# Altium PCB Adapter.PcbDoc
Units mil, origin at the board's own origin, x right, y up, seen from the top; angles counter-clockwise.
Board outline 5085 x 4025 mil, 2 copper layers (Top Layer, Bottom Layer); 16 components, 65 nets, 204 pads, 53 vias.
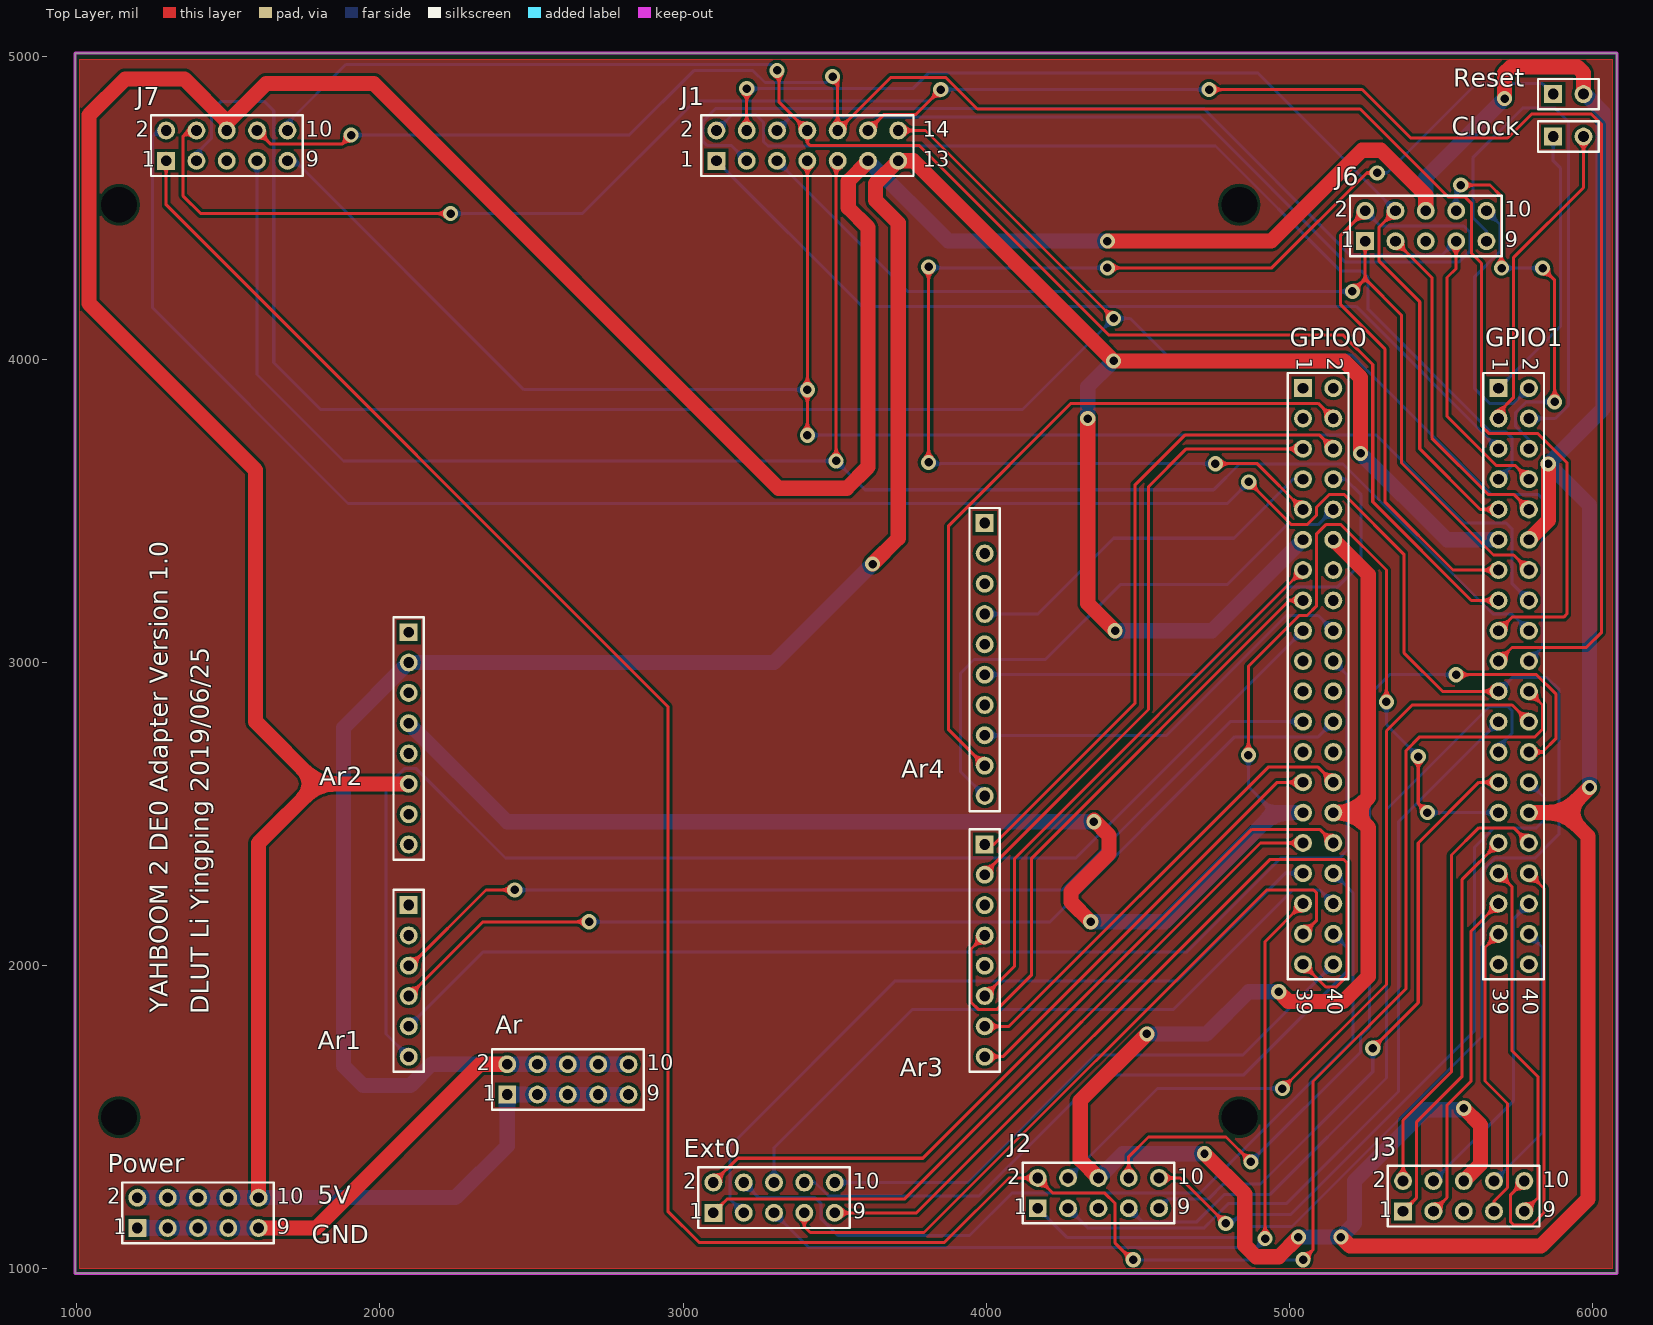
[diagram p0: Top Layer view]
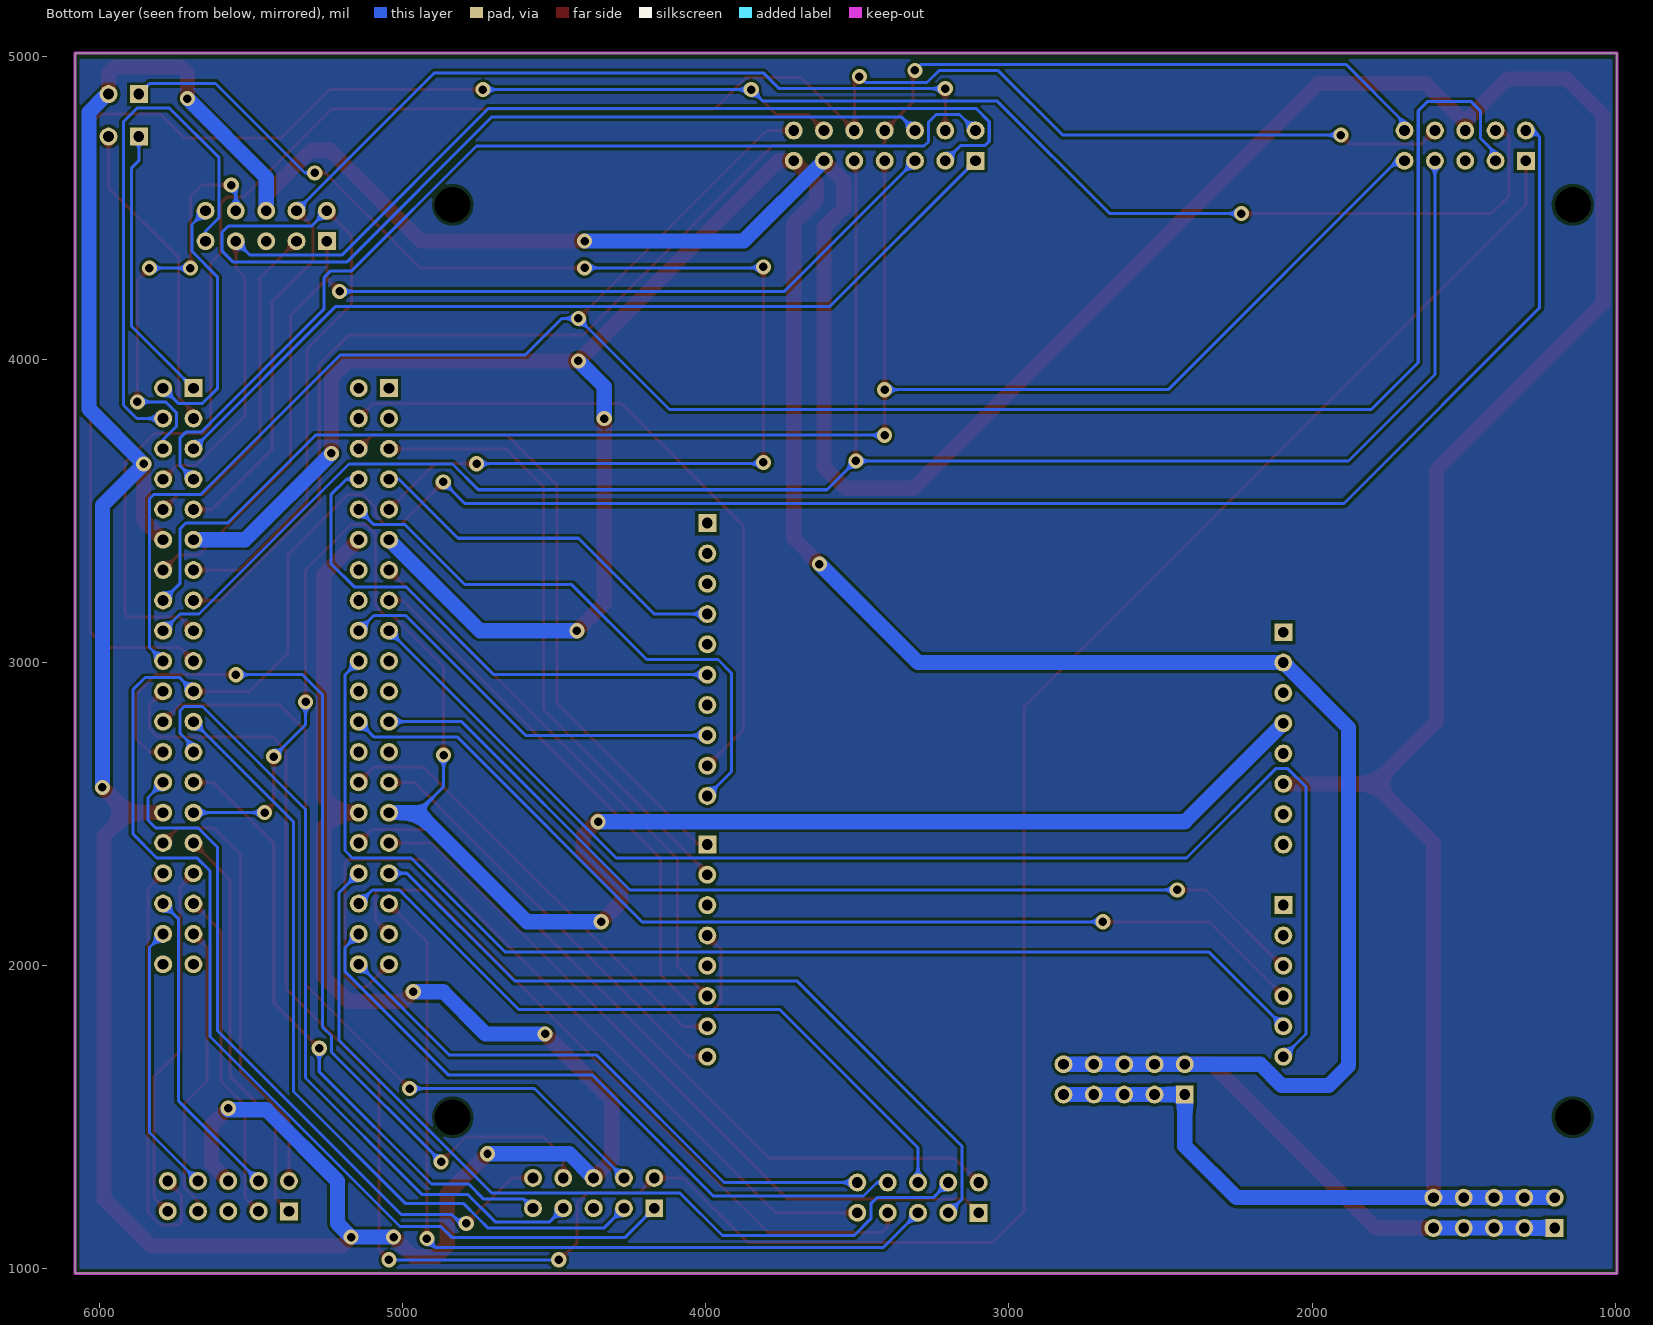
[diagram p1: Bottom Layer view, seen from below]

## Layer stack, top to bottom
Top Solder: solder mask 0.4, Solder Resist, Dk 3.5
Top Layer: signal copper 1.4
Dielectric 1: dielectric 12.6, FR-4, Dk 4.8
Bottom Layer: signal copper 1.4
Bottom Solder: solder mask 0.4, Solder Resist, Dk 3.5

## Board outline
995,985 995,5010 6080,5010 6080,985

## Design rules (kind name [scope] priority, off if disabled: settings)
Clearance [All] p1: gap=10 ignorepadtopadclearanceinfootprint=FALSE except(0: Arc-Hole Track-Hole SMDPad-Hole THPad-Hole Via-Hole Fill-Hole Poly-Hole Region-Hole Text-Hole)
HoleToHoleClearance [All] p1: gap=5 allowstackedmicrovias=TRUE
MinimumSolderMaskSliver [All] p1: minsoldermaskwidth=5
PolygonConnect [All] p1: connectstyle=Relief reliefconductorwidth=10 reliefentries=4 polygonreliefangle="90 Angle" airgapwidth=10
RoomDefinition Adapter [InComponentClass('Adapter')] p1: confinementstyle=ConfineIn formatcopy=TRUE lockcomponents=FALSE outline 1010,1000 6065,1000 6065,4990 1010,4990
RoutingVias [All] p1: holewidth=28 width=50 viastyle="Through Hole" minholewidth=28 minwidth=50 maxholewidth=28 maxwidth=50
SilkToSilkClearance [All] p1: silktosilkclearance=5
SilkToSolderMaskClearance [IsPad] p1: minsilkscreentomaskgap=5 clearancetoexposedcopper=TRUE
SolderMaskExpansion [All] p1: expansion=4
Width [All] p1: maxlimit=50 minlimit=10 preferedwidth=10 minimp=50.000000 maximp=50.000000 favimp=50.000000
26 further rules are at their usual default settings.

## Components (designator, comment, footprint, x,y, rotation, side; value= is the part's Value field where it differs from the comment)
Ar "HEADER 5X2" HDR2X5 2420,1575 r0 top
Ar1 "CON6" HDR1X6 2095,2200 r270 top
Ar2 "CON8" HDR1X8 2095,3100 r270 top
Ar3 "CON8" HDR1X8 3995,2400 r270 top
Ar4 "CON10" HDR1X10 3995,3460 r270 top
Clock "CON2" HDR1X2 5870,4735 r0 top
Ext0 "HEADER 5X2" HDR2X5 3100,1185 r0 top
GPIO0 "HEADER 20X2" HDR2X20 5045,3905 r270 top
GPIO1 "HEADER 20X2" HDR2X20 5690,3905 r270 top
J1 "HEADER 7X2" HDR2X7 3110,4655 r0 top
J2 "HEADER 5X2" HDR2X5 4170,1200 r0 top
J3 "HEADER 5X2" HDR2X5 5375,1190 r0 top
J6 "HEADER 5X2" HDR2X5 5250,4390 r0 top
J7 "HEADER 5X2" HDR2X5 1295,4655 r0 top
Power "HEADER 5X2" HDR2X5 1200,1135 r0 top
Reset "CON2" HDR1X2 5870,4875 r0 top

## Footprints (in the part's own frame and the unit in brackets; to place one, negate y for a bottom-side part, rotate by r counter-clockwise, add the part's x,y. Pads: shape width x height; smd on the part's side, far side on the other; paste and mask are expansions set on the pad)
HDR1X2 [mm] "Connector; Header; 2 Position"
  rect 1.5x1.5 hole 0.9: 1(0,0)
  round 1.5 hole 0.9: 2(2.54,0)
  silkscreen extent -1.27,-1.27 3.81,1.27
HDR1X6 [mm] "Connector; Header; 6 Position"
  rect 1.5x1.5 hole 0.9: 1(0,0)
  round 1.5 hole 0.9: 2(2.54,0) 3(5.08,0) 4(7.62,0) 5(10.16,0) 6(12.7,0)
  silkscreen extent -1.27,-1.27 13.97,1.27
HDR1X8 [mm] "Connector; Header; 8 Position"
  rect 1.5x1.5 hole 0.9: 1(0,0)
  round 1.5 hole 0.9: 2(2.54,0) 3(5.08,0) 4(7.62,0) 5(10.16,0) 6(12.7,0) 7(15.24,0) 8(17.78,0)
  silkscreen extent -1.27,-1.27 19.05,1.27
HDR1X10 [mm] "Connector; Header; 10 Position"
  rect 1.5x1.5 hole 0.9: 1(0,0)
  round 1.5 hole 0.9: 2(2.54,0) 3(5.08,0) 4(7.62,0) 5(10.16,0) 6(12.7,0) 7(15.24,0) 8(17.78,0) 9(20.32,0) 10(22.86,0)
  silkscreen extent -1.27,-1.27 24.13,1.27
HDR2X5 [mm] "Connector; Header; 5x2 Position"
  rect 1.5x1.5 hole 0.9: 1(0,0)
  round 1.5 hole 0.9: 2(0,2.54) 3(2.54,0) 4(2.54,2.54) 5(5.08,0) 6(5.08,2.54) 7(7.62,0) 8(7.62,2.54) 9(10.16,0) 10(10.16,2.54)
  silkscreen extent -1.27,-1.27 11.43,3.81
HDR2X7 [mm] "Connector; Header; 7x2 Position"
  rect 1.5x1.5 hole 0.9: 1(0,0)
  round 1.5 hole 0.9: 2(0,2.54) 3(2.54,0) 4(2.54,2.54) 5(5.08,0) 6(5.08,2.54) 7(7.62,0) 8(7.62,2.54) 9(10.16,0) 10(10.16,2.54) 11(12.7,0) 12(12.7,2.54) 13(15.24,0) 14(15.24,2.54)
  silkscreen extent -1.27,-1.27 16.51,3.81
HDR2X20 [mm] "Connector; Header; 20x2 Position"
  rect 1.5x1.5 hole 0.9: 1(0,0)
  round 1.5 hole 0.9: 2(0,2.54) 3(2.54,0) 4(2.54,2.54) 5(5.08,0) 6(5.08,2.54) 7(7.62,0) 8(7.62,2.54) 9(10.16,0) 10(10.16,2.54) 11(12.7,0) 12(12.7,2.54) 13(15.24,0) 14(15.24,2.54) 15(17.78,0) 16(17.78,2.54) 17(20.32,0) 18(20.32,2.54) 19(22.86,0) 20(22.86,2.54) 21(25.4,0) 22(25.4,2.54) 23(27.94,0) 24(27.94,2.54) 25(30.48,0) 26(30.48,2.54) 27(33.02,0) 28(33.02,2.54) 29(35.56,0) 30(35.56,2.54) 31(38.1,0) 32(38.1,2.54) 33(40.64,0) 34(40.64,2.54) 35(43.18,0) 36(43.18,2.54) 37(45.72,0) 38(45.72,2.54) 39(48.26,0) 40(48.26,2.54)
  silkscreen extent -1.27,-1.27 49.53,3.81

## Part data
Clock Reset: "Connector"

## Free pads (board coordinates)
  round 60 hole 118.11: 1(4835,1500) 2(1140,1500) 3(1140,4510) 4(4835,4510)

## Via types
v1: diameter 50, hole 28, Top Layer to Bottom Layer, 53 vias

## Nets (pads, with @x,y where several pads share a name; then routed paths per layer and width w, separated by ;. In a path a pad name is that pad's centre, name@x,y a point inside that pad or via, vN(x,y) a via of type N, cw(c..) or ccw(c..) an arc to the next point about the centre after c; other vN are vias at no path point)
3.3V: Ar2.4 GPIO0.29 GPIO1.29 | length 6137.2
  Top Layer w10: v1(4865,2695) 4865,2987.97 5032.26,3155.24 5058.21,3155.24 5090,3187.03 5090,3425 5120,3455 5170,3455 5320,3305 v1(5320,2870) ; v1(5425,2690) 5425,2535 v1(5455,2505)
  Top Layer w50: v1(4345,2145) 4280,2210 4280,2245 4405,2370 4405,2430 4355,2480 v1(4355,2475)
  Bottom Layer w10: v1(4865,2695) 4865,2590 4950,2505 ; v1(5320,2870) 5320,2795 v1(5425,2690) ; v1(5455,2505) GPIO1.29
  Bottom Layer w50: Ar2.4 2420,2475 v1(4355,2475) ; v1@4350,2145 4590,2145 4950,2505 GPIO0.29
5V: Ar2.2 Ar.2 Ar.4 Ar.6 Ar.8 Ar.10 GPIO0.11 GPIO1.11 J1.13 Power.1 Power.3 Power.5 Power.7 Power.9 | length 11304.5
  Top Layer w50: Power.9 1790,1135 2330,1675 Ar.2 ; v1(3625,3325) 3710,3410 3710,4450 3635,4525 3635,4580 J1.13 3760,4655 v1(4420,3995) 5180,3995 5235,3940 v1(5235,3690) ; v1(4335,3805) 4335,3195 v1(4425,3105)
  Bottom Layer w10: v1@4415,3990 4420,3990 v1(4420,3995)
  Bottom Layer w50: Power.1 Power.3 Power.5 Power.7 Power.9 ; Ar.10 Ar.8 Ar.6 Ar.4 Ar.2 2170.86,1675 2100.86,1605 1945,1605 1880,1670 1880,2785 Ar2.2 3300,3000 v1(3625,3325) ; v1(4335,3805) 4335,3910 v1@4415,3990 ; v1(4425,3105) 4745,3105 GPIO0.11 ; v1(5235,3690) 5520,3405 GPIO1.11
CLKB0: Clock.1 GPIO1.1 | length 925.3
  Bottom Layer w10: GPIO1.1 5895,4110 5895,4630 5870,4655 Clock.1
CLKB1: Clock.2 GPIO1.3 | length 1052.2
  Top Layer w10: GPIO1.3 5690,3824.73 5740,3874.73 5740,4336.55 5970,4566.55 5970,4720 Clock.2@5985,4735
DA22: Ext0.1 GPIO0.31 | length 2450.3
  Top Layer w10: Ext0.1 3145,1230 3730,1230 4905,2405 GPIO0.31
DA23: Ext0.2 GPIO0.32 | length 2546.2
  Top Layer w10: Ext0.2 3180,1365 3791,1365 4876,2450 5100,2450 GPIO0.32
DA24: Ext0.3 GPIO0.33 | length 2501.4
  Bottom Layer w10: Ext0.3 3155,1230 3155,1405 3700,1950 4631.2,1950 4986.2,2305 GPIO0.33
DA25: Ext0.4 GPIO0.34 | length 2955.5
  Bottom Layer w10: Ext0.4 3250,1235 3435.47,1235 3455.47,1215 3455.47,1165 3510.47,1110 3945,1110 4085,1250 4705,1250 5209.53,1754.53 5209.53,2240.47 GPIO0.34
DA26: Ext0.5 GPIO0.35 | length 2837.2
  Top Layer w10: v1(4920,1100) 4920,2080 GPIO0.35
  Bottom Layer w10: Ext0.5 3414,1071 4893,1071 4920,1098 v1(4920,1100)
DA27: Ext0.6 GPIO0.36 | length 2330.7
  Bottom Layer w10: Ext0.6 3300,1400 3755,1855 4616,1855 5011,2250 5100,2250 GPIO0.36
DA28: Ext0.7 GPIO0.37 | length 2369.1
  Top Layer w10: Ext0.7 3400,1140 3420,1120 3795,1120 4925,2250 5080,2250 5090,2240 5090,2150 GPIO0.37
DA29: Ext0.8 GPIO0.38 | length 2257.7
  Bottom Layer w10: Ext0.8 3435.47,1285 3480,1240.47 3975.47,1240.47 4375,1640 4849.53,1640 5189.53,1980 5189.53,2060.47 GPIO0.38
DA30: Ext0.9 GPIO0.39 | length 2742.3
  Top Layer w10: Ext0.9 3770,1185 4935,2350 5180,2350 5190,2340 5190,1965 5155,1930 5120,1930 GPIO0.39
DA31: Ext0.10 GPIO0.40 | length 1943.2
  Bottom Layer w10: Ext0.10 3940,1285 4360,1705 4845,1705 GPIO0.40
DB0: GPIO1.2 J6.10 | length 860.4
  Bottom Layer w10: J6.10 5695,4445 5695,4356.29 5610,4271.29 5610,3904.73 5659.73,3855 5740,3855 GPIO1.2
DB1: GPIO1.4 J6.9 | length 1780.4
  Bottom Layer w10: J6.9 5650,4423 5605,4468 5605,4665 5769.53,4829.53 5875.47,4829.53 5920.74,4784.26 5920.74,3849.17 5876.57,3805 GPIO1.4
DB2: GPIO1.5 J1.1 | length 2973.7
  Bottom Layer w10: J1.1 3590.19,4174.81 4403.24,4174.81 4403.43,4175 4436.57,4175 4436.76,4174.81 5220.19,4174.81 GPIO1.5
DB3: GPIO1.6 J6.8 | length 1352.1
  Top Layer w10: v1(5565,4575) 5662,4575 5699,4538 5699,4302 v1(5700,4301) ; v1(5835,4301) 5875,4261 v1(5875,3860)
  Bottom Layer w10: J6.8 5550,4560 v1(5565,4575) ; v1(5700,4301) v1(5835,4301) ; GPIO1.6 5790,3735.47 5745.47,3780 5745.47,3823.44 5782.03,3860 v1(5875,3860)
DB4: GPIO1.7 J1.2 | length 3341.6
  Bottom Layer w10: J1.2 3163,4808 3240,4808 3265.47,4782.53 3265.47,4718.07 3280,4703.54 4756.46,4703.54 5167.89,4292.11 5236.78,4292.11 5260,4268.89 5260,4165 5665,3760 5715,3760 5735,3740 5735,3650 GPIO1.7
DB5: GPIO1.8 J1.3 J6.7 | length 3904
  Top Layer w10: J6.7 5550,4299.93 5520,4269.93 5520,3812.03 5682.03,3650 5745,3650 GPIO1.8
  Bottom Layer w10: J1.3 3160,4705 3080,4705 3065,4720 3065,4784 3109,4828 4716.49,4828 5199.49,4345 5505,4345 J6.7
DB6: GPIO1.9 J1.4 J6.4 | length 3694.5
  Top Layer w10: J1.4 v1(3210,4893) ; J6.4 5295,4435 5295,4325 5430,4190 5430,3705 5630,3505 GPIO1.9
  Bottom Layer w10: v1(3210,4893) 3758,4893 3810,4945 4895,4945 J6.4
DB7: GPIO1.10 J6.3 | length 1117
  Top Layer w10: J6.3 5470,4270 5470,3740 5655,3555 5740,3555 GPIO1.10
DB8: GPIO1.13 J1.6 J6.2 | length 4476.2
  Top Layer w10: J6.2 5168,4408 5168,4182 5315,4035 5315,3530 5540,3305 GPIO1.13
  Bottom Layer w10: J1.6 3355,4800 4705,4800 5183,4322 5560,4322 5595,4357 5595,4420 5575,4440 5300,4440 J6.2
DB9: GPIO1.14 J1.5 J6.1 | length 3483.8
  Top Layer w10: v1(5208,4224) 5250,4266 ; J6.1 5250,4266 ; GPIO1.14 5740,3355 5673,3355 5370,3658 5370,4146 5250,4266
  Bottom Layer w10: J1.5 3741,4224 v1(5208,4224)
DB10: GPIO1.15 J1.8 J7.10 | length 5153.1
  Top Layer w10: v1(3310,4953) 3317,4946 3317,4848 J1.8 3410,4715 3420,4705 3780,4705 4405,4080 5178,4080 5275,3983 5275,3530 5600,3205 GPIO1.15
  Bottom Layer w10: J7.10@1695,4780 1887.5,4972.5 3290.5,4972.5 v1(3310,4953)
DB11: GPIO1.16 J1.7 J7.9 | length 5654.3
  Top Layer w10: v1(3410,3750) v1(3410,3900) J1.7
  Bottom Layer w10: J7.9@1695,4680 2475,3900 v1(3410,3900) ; v1(3410,3750) 5287,3750 5577,3460 5715,3460 5735,3440 5735,3260 GPIO1.16
DB12: GPIO1.17 J1.10 J7.8 | length 6413.7
  Top Layer w10: J7.8@1595,4780 J7.8 1640,4710 1875,4710 v1(1905,4740) ; v1(3493,4933) 3510,4916 J1.10 3685,4930 3866.57,4930 3970.57,4826 5233.59,4826 5524.59,4535 5580,4535 5600,4515 5600,4351 5634,4317 5634,3780 5659,3755 5820,3755 5915,3660 5915,3160 5904.53,3149.53 5734.53,3149.53 GPIO1.17
  Bottom Layer w10: v1(1905,4740) 2823,4740 3035.5,4952.5 3230.5,4952.5 3270,4913 3473,4913 v1(3493,4933)
DB13: GPIO1.18 J1.9 J7.7 | length 6337.5
  Top Layer w10: v1(3505,3665) 3505,4650 J1.9
  Bottom Layer w10: J7.7@1595,4680 J7.7 1595,3950 1880,3665 v1(3505,3665) 3600,3570 4750.14,3570 4835.14,3655 5177.03,3655 5671.56,3160.47 5734.53,3160.47 GPIO1.18
DB14: GPIO1.20 J1.14 J7.3 | length 7360.9
  Top Layer w10: J1.14 3800,4755 v1(4420,4135)
  Bottom Layer w10: J7.3@1395,4680 1445,4730 1445,4820 1475,4850 1620,4850 1650,4820 1650,3990 1805,3835 4120,3835 v1(4420,4135) 4475,4135 4595,4015 5205.19,4015 5665.19,3555 5820,3555 5835,3540 5835,3050 GPIO1.20
DB15: GPIO1.22 J2.2 J7.1 | length 9035.2
  Top Layer w10: J7.1@1295,4680 J7.1 1295,4510 2950,2855 2950,1190 3053,1087 3862,1087 4075,1300 J2.2 4220,1250 4390.94,1250 4425.47,1215.47 4425.47,1085 v1@4485.24,1025.24 ; v1(5045,1030) 5078,1063 5078,1618 5385,1925 5385,2710 5430,2755 5810,2755 5835,2780 5835,2860 GPIO1.22
  Bottom Layer w10: v1(4485.24,1030.24) 4485.35,1030.12 5044.88,1030.12 v1(5045,1030)
DB16: GPIO1.23 J2.3 | length 2660
  Bottom Layer w10: J2.3 4334.53,1135.47 4719.47,1135.47 4750,1166 4750,1166.57 4798.43,1215 4990,1215 5360,1585 5360,2475 GPIO1.23
DB17: GPIO1.24 J2.4 | length 2679.3
  Top Layer w10: v1(4977,1595) 5320,1938 5320,2775 5405,2860 5735,2860 GPIO1.24
  Bottom Layer w10: J2.4 4565,1595 v1(4977,1595)
DB18: GPIO1.25 J2.7 | length 2665.7
  Bottom Layer w10: J2.7 4514.53,1155.47 4694.47,1155.47 4784,1245 4935,1245 5320,1630 5320,2515 5660,2855 5720,2855 5735,2840 5735,2767.81 5690,2722.81 GPIO1.25
DB19: GPIO1.26 J2.8 | length 3160.7
  Top Layer w10: J2.8 4470,1370 4535,1435 4791,1435 v1(4873,1353) ; v1(5550,2960) 5815,2960 5880,2895 5880,2750 5835,2705 GPIO1.26
  Bottom Layer w10: v1(4873,1353) 5234.68,1714.68 5234.68,1768.1 5264,1797.42 5264,2894 5330,2960 v1(5550,2960)
DB20: GPIO1.27 J2.9 | length 2056.4
  Top Layer w10: v1(5275,1728) 5425,1878 5425,2405 5625,2605 GPIO1.27
  Bottom Layer w10: J2.9 4600,1230 4732,1230 4782,1280 4905,1280 5275,1650 v1(5275,1728)
DB21: GPIO1.28 J2.10 | length 2383.1
  Top Layer w10: J2.10 4640,1300 v1(4790,1150)
  Bottom Layer w10: v1(4790,1150) 4809,1150 4839,1180 5005,1180 5610,1785 5610,2390 5675,2455 5815,2455 5840,2480 5840,2555 GPIO1.28
DB22: GPIO1.31 J3.1 | length 1345.5
  Top Layer w10: J3.1 5420,1235 5420,1485 5570,1635 5570,2285 GPIO1.31
DB23: GPIO1.32 J3.2 | length 1454.3
  Top Layer w10: J3.2 5375,1490 5535,1650 5535,2365 5625,2455 5740,2455 GPIO1.32
DB24: GPIO1.33 J3.9 | length 1187.5
  Top Layer w10: GPIO1.33 5735,2260 5735,1719 5820,1634 5820,1235 J3.9
DB25: GPIO1.34 J3.10 | length 1425.1
  Top Layer w10: J3.10 5730,1245 5730,1155 5740,1145 5800,1145 5840,1185 5840,2255 GPIO1.34
DB26: GPIO1.35 J3.3 | length 1104.1
  Top Layer w10: J3.3 5520,1235 5520,1540 5599,1619 5599,2114 GPIO1.35
DB27: GPIO1.36 J3.4 | length 1045.5
  Bottom Layer w10: J3.4 5740,1555 5740,2155 GPIO1.36
DB28: GPIO1.37 J3.7 | length 983
  Top Layer w10: J3.7 5675,1223.47 5719.53,1268 5719.53,1545.47 5645,1620 5645,2060 GPIO1.37
DB29: GPIO1.38 J3.8 | length 899.9
  Bottom Layer w10: J3.8 5835,1450 5835,2060 GPIO1.38
DB30: GPIO1.39
DB31: GPIO1.40
DBT0: GPIO1.19 J1.12 J7.4 | length 7596.7
  Top Layer w10: J7.4@1395,4780 1350,4735 1350,4540 1409,4481 v1(2233,4481) ; J1.12 3662,4807 3767,4807 v1(3850,4890) ; v1(4735,4890) 5240,4890 5400,4730 5720,4730 5800,4810 5995,4810 6030,4775 6030,4737 6030,3552 6030,3100 5979.53,3049.53 5734.53,3049.53 GPIO1.19
  Bottom Layer w10: v1(2233,4481) 2668,4481 3040,4853 3813,4853 v1(3850,4890) v1(4735,4890)
DBT1: GPIO1.21 J2.1 J7.2 | length 9281.1
  Top Layer w10: v1(4866.14,3595.86) 5007,3455 5057.97,3455 5090,3487.03 5090,3512.97 5132.03,3555 5180,3555 5377.51,3357.49 5377.51,3032.49 5505,2905 GPIO1.21
  Bottom Layer w10: J7.2@1295,4780 1250,4735 1250,4170 1895,3525 4795.28,3525 v1(4866.14,3595.86) ; J2.1 4266,1104 4838,1104 4874,1140 5008.43,1140 5635,1766.57 5635,2312.97 5677.03,2355 5810,2355 5890,2435 5890,2910 5850,2950 5735,2950 GPIO1.21
GND: Ar2.6 Ar.1 Ar.3 Ar.5 Ar.7 Ar.9 GPIO0.12 GPIO0.30 GPIO1.12 GPIO1.30 J1.11 J2.6 J3.6 J6.6 J7.6 Power.2 Power.4 Power.6 Power.8 Power.10 Reset.2 | length 23793.7
  Top Layer w10: J7.6@1495,4780 1495,4785
  Top Layer w50: J7.6@1495,4780 1625,4910 1980,4910 3315,3575 3540,3575 3610,3645 3610,4435 3545,4500 3545,4587.55 3610,4652.55 J1.11 ; 1495,4785 1355,4925 1160,4925 1040.86,4805.86 1040.86,4184.14 1590,3635 1590,2805 1795,2600 ; Power.10 1600,2405 1795,2600 ; Ar2.6 1795,2600 ; J2.6 4310,1360 4310,1555 v1(4530,1775) ; v1(4400,4390) 4940,4390 5240,4690 5302.6,4690 5450,4542.6 J6.6 ; v1(4720,1380) 4853,1247 4853,1077 4890,1040 4965,1040 v1(5030,1105) ; v1(4965,1914) 4996.5,1882.5 5177.5,1882.5 5260,1965 5260,2455 5210,2505 ; GPIO0.30 5210,2505 ; GPIO0.12 5260,3290 5260,2555 5210,2505 ; v1(5170,1105) 5200,1075 5830,1075 5985,1230 5985,2427 5907,2505 ; J3.6 5630,1345 5630,1475 v1(5575,1530) ; v1(5710,4860) 5710,4945 5730,4965 5950,4965 5970,4945 Reset.2@5970,4890 ; GPIO1.30 5907,2505 ; GPIO1.12 5854.53,3469.53 5854.53,3654.47 v1(5854,3655) ; v1(5990,2588) 5907,2505
  Bottom Layer w50: Power.2 Power.4 Power.6 Power.8 Power.10 2250,1235 2420,1405 Ar.1 Ar.3 Ar.5 Ar.7 Ar.9 ; J1.11 3875,4390 v1(4400,4390) ; J2.6 4450,1380 v1(4720,1380) ; v1(4530,1775) 4727.14,1775 4866.14,1914 v1(4965,1914) ; v1(5030,1105) v1(5170,1105) 5215,1150 5215,1290 5450,1525 v1@5575,1525 ; J6.6 5450,4600 v1(5710,4860) ; Reset.2@5985,4865 6035,4815 6035,3836 v1(5854,3655) 5990,3519 v1(5990,2588)
NetAr1_3: Ar1.3 GPIO0.23 | length 3283.4
  Top Layer w10: Ar1.3 2100,2000 2350,2250 v1(2445,2250)
  Bottom Layer w10: v1(2445,2250) 4250,2250 4805,2805 GPIO0.23
NetAr1_4: Ar1.4 GPIO0.24 | length 3425.5
  Top Layer w10: Ar1.4 2340,2145 v1(2690,2145)
  Bottom Layer w10: v1(2690,2145) 3956.08,2145 3956.08,2144.53 4209.53,2144.53 4820,2755 5095,2755 GPIO0.24
NetAr1_5: Ar1.5 GPIO0.20 | length 3978.9
  Bottom Layer w10: Ar1.5 2339.53,2044.53 4660.53,2044.53 4971,2355 5165,2355 5190,2380 5190,2960 GPIO0.20
NetAr1_6: Ar1.6 GPIO0.17 | length 4403.4
  Bottom Layer w10: Ar1.6 2020,1775 2020,2590 2080,2650 2120,2650 2414.53,2355.47 4295.47,2355.47 GPIO0.17
NetAr3_1: Ar3.1 GPIO0.6 | length 2149.6
  Top Layer w10: Ar3.1 4025,2400 4490,2865 4490,3585 4655,3750 5100,3750 GPIO0.6
NetAr3_2: Ar3.2 GPIO0.5 | length 2065.5
  Top Layer w10: Ar3.2 3995,2305 4535,2845 4535,3580 4660,3705 GPIO0.5
NetAr3_4: Ar3.4 GPIO0.15 | length 2128.7
  Top Layer w10: Ar3.4 3950,2055 3950,1880 3975,1855 4035,1855 4150,1970 4150,2355 5000,3205 GPIO0.15
NetAr3_6: Ar3.6 GPIO0.13 | length 1839.9
  Top Layer w10: Ar3.6 4093,1998 4093,2353 GPIO0.13
NetAr3_7: Ar3.7 GPIO0.28 | length 1524.9
  Top Layer w10: Ar3.7 4075,1800 4930,2655 5095,2655 GPIO0.28
NetAr3_8: Ar3.8 GPIO0.27 | length 1424.9
  Top Layer w10: Ar3.8 4055,1700 4960,2605 GPIO0.27
NetAr4_4: Ar4.4 GPIO0.7 | length 1234.3
  Bottom Layer w10: Ar4.4 4170,3160 4420,3410 4817,3410 5012,3605 GPIO0.7
NetAr4_6: Ar4.6 GPIO0.8 | length 1733.4
  Bottom Layer w10: Ar4.6 4699,2960 4989,3250 5160,3250 5236.78,3326.78 5236.78,3553.22 5185,3605 GPIO0.8
NetAr4_8: Ar4.8 GPIO0.18 | length 1334.3
  Bottom Layer w10: Ar4.8 4595,2760 4990,3155 5095,3155 GPIO0.18
NetAr4_9: Ar4.9 GPIO0.4 | length 2298.2
  Top Layer w10: Ar4.9 3875,2780 3875,3450 4280,3855 5095,3855 GPIO0.4
NetAr4_10: Ar4.10 GPIO0.10 | length 1891.8
  Bottom Layer w10: Ar4.10 3915,2640 3915,2965 3960,3010 4195,3010 4442,3257 4794,3257 4992,3455 5095,3455 GPIO0.10
RST_N: GPIO0.9 Reset.1 | length 4286.8
  Top Layer w10: v1(3810,3660) v1(3810,4305) ; v1(4400,4302) 4942,4302 5255,4615 v1(5290,4615) ; v1(4756,3656) 4894,3656 GPIO0.9
  Bottom Layer w10: v1(3810,3660) 3814,3656 v1(4756,3656) ; v1(3810,4305) 3813,4302 v1(4400,4302) ; v1(5290,4615) 5322,4615 5617,4910 5835,4910 Reset.1 Reset.1@5885,4875
pads on no net: Ar1.1 Ar1.2 Ar2.1 Ar2.3 Ar2.5 Ar2.7 Ar2.8 Ar3.3 Ar3.5 Ar4.1 Ar4.2 Ar4.3 Ar4.5 Ar4.7 GPIO0.1 GPIO0.2 GPIO0.3 GPIO0.14 GPIO0.16 GPIO0.19 GPIO0.21 GPIO0.22 GPIO0.25 GPIO0.26 J2.5 J3.5 J6.5 J7.5

## Polygon pours and split planes (outlines as drawn)
no net on Top Layer (solid, pour order 14): 1010,4990 6065,4990 6065,1000 1010,1000
no net on Top Layer (solid, pour order 12): 1010,4990 6065,4990 6065,1000 1010,1000
no net on Top Layer "Top" (solid, pour order 8): 1010,4990 1010,1000 6065,1000 6065,4990
no net on Bottom Layer "Bottom" (solid, pour order 10): 1010,4995 1010,1000 6065,1000 6065,4990 1015,4990

## Keep-outs
Keep-Out Layer:
  the board outline again, w10

## Silkscreen, mask and mechanical layers (free items; w line width, h text height)
Top Overlay:
  text "YAHBOOM 2 DE0 Adapter Version 1.0" at 1300,1845 h60 r90
  text "DLUT Li Yingping 2019/06/25" at 1435,1840 h60 r90
  text "5V" at 1795,1215 h60
  text "GND" at 1775,1085 h60

## Text inside footprints (layer, text, board x,y; h text height)
Ar: Top Overlay "2" at 2320,1655 h50; Top Overlay "1" at 2340,1555 h50; Top Overlay "9" at 2880,1555 h50; Top Overlay "10" at 2880,1655 h50
Ext0: Top Overlay "10" at 3560,1265 h50; Top Overlay "9" at 3560,1165 h50; Top Overlay "1" at 3020,1165 h50; Top Overlay "2" at 3000,1265 h50
GPIO0: Top Overlay "1" at 5025,4005 h50 r270; Top Overlay "2" at 5125,4005 h50 r270; Top Overlay "40" at 5125,1925 h50 r270; Top Overlay "39" at 5025,1925 h50 r270
GPIO1: Top Overlay "1" at 5670,4005 h50 r270; Top Overlay "2" at 5770,4005 h50 r270; Top Overlay "40" at 5770,1925 h50 r270; Top Overlay "39" at 5670,1925 h50 r270
J1: Top Overlay "2" at 2990,4735 h50; Top Overlay "1" at 2990,4635 h50; Top Overlay "14" at 3790,4735 h50; Top Overlay "13" at 3790,4635 h50
J2: Top Overlay "10" at 4630,1280 h50; Top Overlay "9" at 4630,1180 h50; Top Overlay "1" at 4090,1180 h50; Top Overlay "2" at 4070,1280 h50
J3: Top Overlay "10" at 5835,1270 h50; Top Overlay "9" at 5835,1170 h50; Top Overlay "1" at 5295,1170 h50; Top Overlay "2" at 5275,1270 h50
J6: Top Overlay "10" at 5710,4470 h50; Top Overlay "9" at 5710,4370 h50; Top Overlay "1" at 5170,4370 h50; Top Overlay "2" at 5150,4470 h50
J7: Top Overlay "10" at 1755,4735 h50; Top Overlay "9" at 1755,4635 h50; Top Overlay "1" at 1215,4635 h50; Top Overlay "2" at 1195,4735 h50
Power: Top Overlay "10" at 1660,1215 h50; Top Overlay "9" at 1660,1115 h50; Top Overlay "1" at 1120,1115 h50; Top Overlay "2" at 1100,1215 h50